# EAGLE board mini system- 5 components (EAGLE 9.2.2)
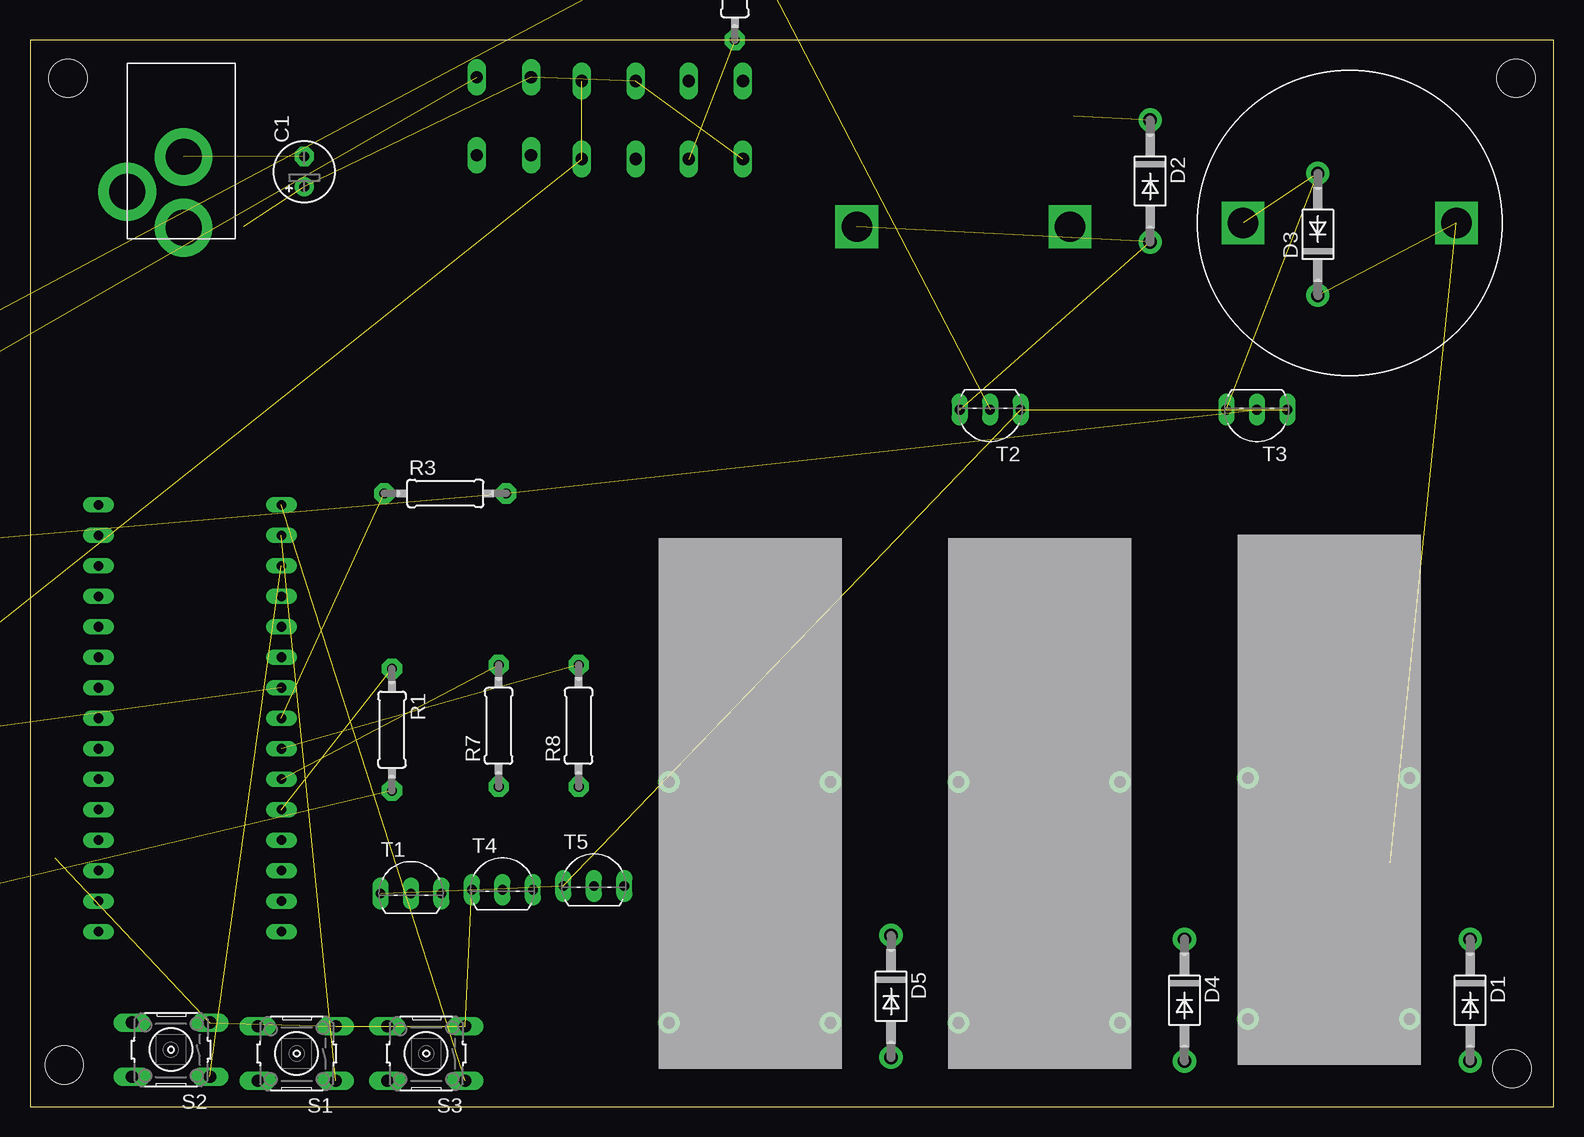
[diagram p0: board, top side]
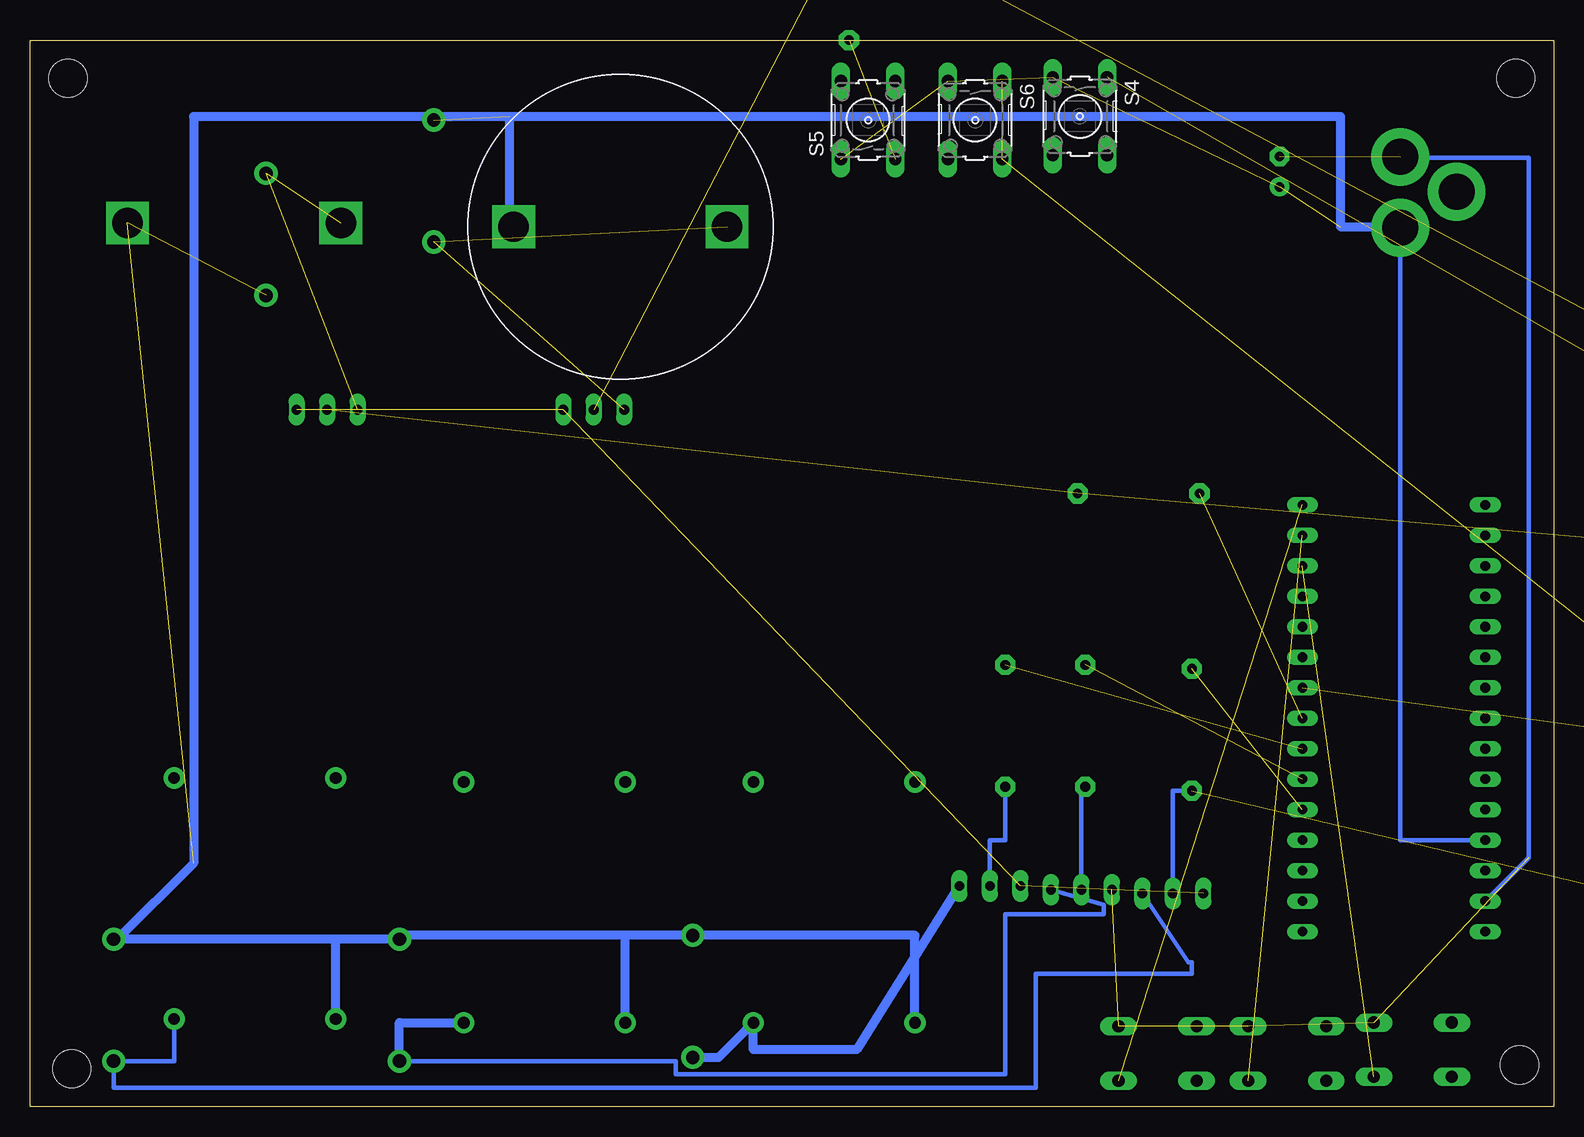
[diagram p1: board, bottom side, seen from below]

Size 126.99 x 88.89 mm. Coordinates in mm from the lower left corner, seen from the top.
Outline: 126.99,0 126.99,88.89 0,88.89 0,0 126.99,0
Copper layers (1*16): Top 0.035mm / dielectric 1.5mm / Bottom 0.035mm
Design rules "default": minimum track width 6mil, minimum drill 0.35mm, track to track 6mil, track to pad 6mil, pad to pad 6mil, via to via 6mil, smd to smd 6mil, copper to edge 40mil, drill to drill 6mil, minimum pad ring 10mil, minimum via ring 8mil, stop-mask expansion 4mil, vias tented up to drill 0mil, thermal gap 10mil
Holes 3.17 mm at 3.17,85.72 2.86,3.49 123.51,3.17 123.83,85.72

## Footprints (pad centres in the part's own frame; a part is rotated, then mirrored left to right if it is on the bottom)
E2,5-5 = drill 0.813 pad 1.6: + -1.27,0 | drill 0.813 pad 1.6 octagon: - 1.27,0
DO41-10 = drill 1.118 pad 1.93: A 5.08,0; C -5.08,0
PUMP = drill 2.54 square: P$1 -8.89,0; P$2 8.89,0
0207/10 = drill 0.813 pad 1.676 octagon: 1 -5.08,0; 2 5.08,0
B3F-10XX = drill 1.016 long: 1 -3.251,2.261; 2 3.251,2.261; 3 -3.251,-2.261; 4 3.251,-2.261
TO92-EBC-OVAL = drill 0.813 long: B 0,-1.27; C 2.54,-1.27; E -2.54,-1.27
NANO = drill 0.8 long: 3.3V -10.16,24.13; 5V -10.16,-1.27; A0 -10.16,19.05; A1 -10.16,16.51; A2 -10.16,13.97; A3 -10.16,11.43; A4 -10.16,8.89; A5 -10.16,6.35; A6 -10.16,3.81; A7 -10.16,1.27; AREF -10.16,21.59; D2 5.08,1.27; D3 5.08,3.81; D4 5.08,6.35; D5 5.08,8.89; D6 5.08,11.43; D7 5.08,13.97; D8 5.08,16.51; D9 5.08,19.05; D10 5.08,21.59; D11 5.08,24.13; D12 5.08,26.67; D13 -10.16,26.67; GND -10.16,-6.35; GND1 5.08,-1.27; RAW -10.16,-8.89; RST -10.16,-3.81; RST1 5.08,-3.81; RX1 5.08,-6.35; TX0 5.08,-8.89
VALVTEST2 = drill 0.965 pad 1.778: PAD10 3.835,-0.864; PAD11 3.835,-14.326; PAD12 23.901,-14.326; PAD13 23.901,-0.864
PJ-102A = drill 3 pad 4.8: RING 0.1,-3.39; RING_SW -4.6,-6.29; TIP 0.1,-9.29

## Placement (x,y rotation side)
C1  [E2,5-5]  22.86,77.93 90 top
D1  1N4004  [DO41-10]  120.02,8.89 270 top
D2  1N4004  [DO41-10]  93.34,77.15 270 top
D3  1N4004  [DO41-10]  107.31,72.71 90 top
D4  1N4004  [DO41-10]  96.2,8.89 270 top
D5  1N4004  [DO41-10]  71.75,9.21 270 top
PUMP1  DCPUMP  [PUMP]  77.79,73.34 0 bottom
R1  [0207/10]  30.16,31.43 270 top
R2  [0207/10]  -99.06,17.78 0 top  (outside the outline)
R3  [0207/10]  34.61,51.12 0 top
R4  [0207/10]  58.74,93.98 270 top
R5  [0207/10]  -55.24,37.78 90 top  (outside the outline)
R6  [0207/10]  -59.69,0 90 top  (outside the outline)
R7  [0207/10]  39.05,31.75 90 top
R8  [0207/10]  45.72,31.75 90 top
S1  [B3F-10XX]  22.23,4.45 180 top
S2  [B3F-10XX]  11.75,4.76 180 top
S3  [B3F-10XX]  33.02,4.45 180 top
S4  [B3F-10XX]  39.49,82.55 270 bottom
S5  [B3F-10XX]  57.15,82.23 90 bottom
S6  [B3F-10XX]  48.23,82.23 270 bottom
T1  2N2222  [TO92-EBC-OVAL]  31.75,19.05 0 top
T2  2N2222  [TO92-EBC-OVAL]  80.01,56.83 180 top
T3  2N2222  [TO92-EBC-OVAL]  102.23,56.83 180 top
T4  2N2222  [TO92-EBC-OVAL]  39.37,19.37 0 top
T5  2N2222  [TO92-EBC-OVAL]  46.99,19.68 0 top
U$1  NANO  [NANO]  15.88,23.5 0 top
U$2  [VALVTEST2]  100.65,3.49 90 top
U$3  [VALVTEST2]  76.52,3.17 90 top
U$4  DCPUMP  [PUMP]  109.98,73.66 0 top
U$5  2.1MMJACKTHM  [PJ-102A]  12.7,82.55 0 top
U$6  [VALVTEST2]  52.39,3.17 90 top

## Library data of the parts
C1 D1-D5 R1-R8 T1-T5 U$5 = adafruit
PUMP1 U$2-U$4 U$6 = local eagle library
S1-S6 = switch-omron; MPN: B3F-1000; OC_FARNELL: 176432; OC_NEWARK: 36M3542
U$1 = Arduino-clone

## Nets
5V: C1.+ D1.C D2.C D3.C D4.C D5.C PUMP1.P$1 S4.3 S5.1 S6.3 U$1.5V U$2.PAD10 U$3.PAD10 U$4.P$2 U$5.TIP U$6.PAD10
GND: C1.- S1.3 S2.3 S3.3 T1.E T2.E T3.E T4.E T5.E U$1.GND U$5.RING
N$1: R1.2 R6.2 T1.B
N$2: R2.2 R4.1 T2.B
N$3: R3.2 R5.2 T3.B
N$4: R1.1 U$1.D2
N$5: D2.A PUMP1.P$2 T2.C
N$6: R3.1 U$1.D5
N$7: R2.1 U$1.D6
N$8: D1.A T1.C U$2.PAD11
N$9: D3.A T3.C U$4.P$1
N$10: R4.2 S5.3
N$11: S1.1 U$1.D11
N$12: S2.1 U$1.D10
N$13: S3.1 U$1.D12
N$14: R6.1 S6.1 S6.2
N$15: R5.1 S4.1
N$16: D4.A T4.C U$3.PAD11
N$17: R7.1 T4.B
N$18: R7.2 U$1.D3
N$19: R8.2 U$1.D4
N$20: R8.1 T5.B
N$21: D5.A T5.C U$6.PAD11

## Tracks (layer width: path | path; a pad name or v marks a point on that pad's centre or on a via)
5V  (7 unrouted)
  Bottom 0.381: D1.C 119.7,13.97 | U$5.TIP 12.8,22.23 U$1.5V
  Bottom 0.762: U$6.PAD10 53.25,14.29 D5.C 77.38,14.29 | 87,82.55 113.35,82.55 113.35,20.32 119.7,13.97 101.51,13.97 | 87,82.55 17.78,82.55 17.78,73.34 12.8,73.34 U$5.TIP | 77.38,14.29 96.2,14.29 D4.C 101.51,13.97 | U$3.PAD10 77.38,14.29 | U$2.PAD10 101.51,13.97 | PUMP1.P$1 87,73.34 87,82.55
GND  (9 unrouted)
  Bottom 0.381: U$1.GND 2.08,20.78 2.08,79.11 12.8,79.11 U$5.RING
N$1  (1 unrouted)
  Bottom 0.381: R1.2 31.75,26.35 T1.B
N$2  (2 unrouted)
N$3  (2 unrouted)
N$4  (1 unrouted)
N$5  (2 unrouted)
N$6  (1 unrouted)
N$7  (1 unrouted)
N$8
  Bottom 0.381: U$2.PAD11 114.97,3.81 D1.A 120.02,1.59 43.18,1.59 43.18,11.11 30.16,11.11 30.16,12.06 30.48,12.06 T1.C
N$9  (2 unrouted)
N$10  (1 unrouted)
N$11  (1 unrouted)
N$12  (1 unrouted)
N$13  (1 unrouted)
N$14  (2 unrouted)
N$15  (1 unrouted)
N$16
  Bottom 0.381: D4.A 73.17,3.81 73.17,2.72 45.72,2.72 45.72,16.04 37.5,16.04 37.5,16.83 T4.C
  Bottom 0.762: D4.A 96.2,7.01 U$3.PAD11
N$17
  Bottom 0.381: R7.1 39.37,26.67 T4.B
N$18  (1 unrouted)
N$19  (1 unrouted)
N$20
  Bottom 0.381: R8.1 45.72,22.23 46.99,22.23 T5.B
N$21
  Bottom 0.762: D5.A 69.6,4.13 U$6.PAD11 66.71,4.76 58.1,4.76 T5.C